# Altium PCB PCB_ESP32-H2-AC-Power-monitoring_2025-10-18.pcbdoc
Units mil, origin at the board's own origin, x right, y up, seen from the top; angles counter-clockwise.
Board outline 5178.72 x 4101.7 mil, 2 copper layers (Top Layer, Bottom Layer); 16 components, 9 nets, 58 pads, 0 vias.
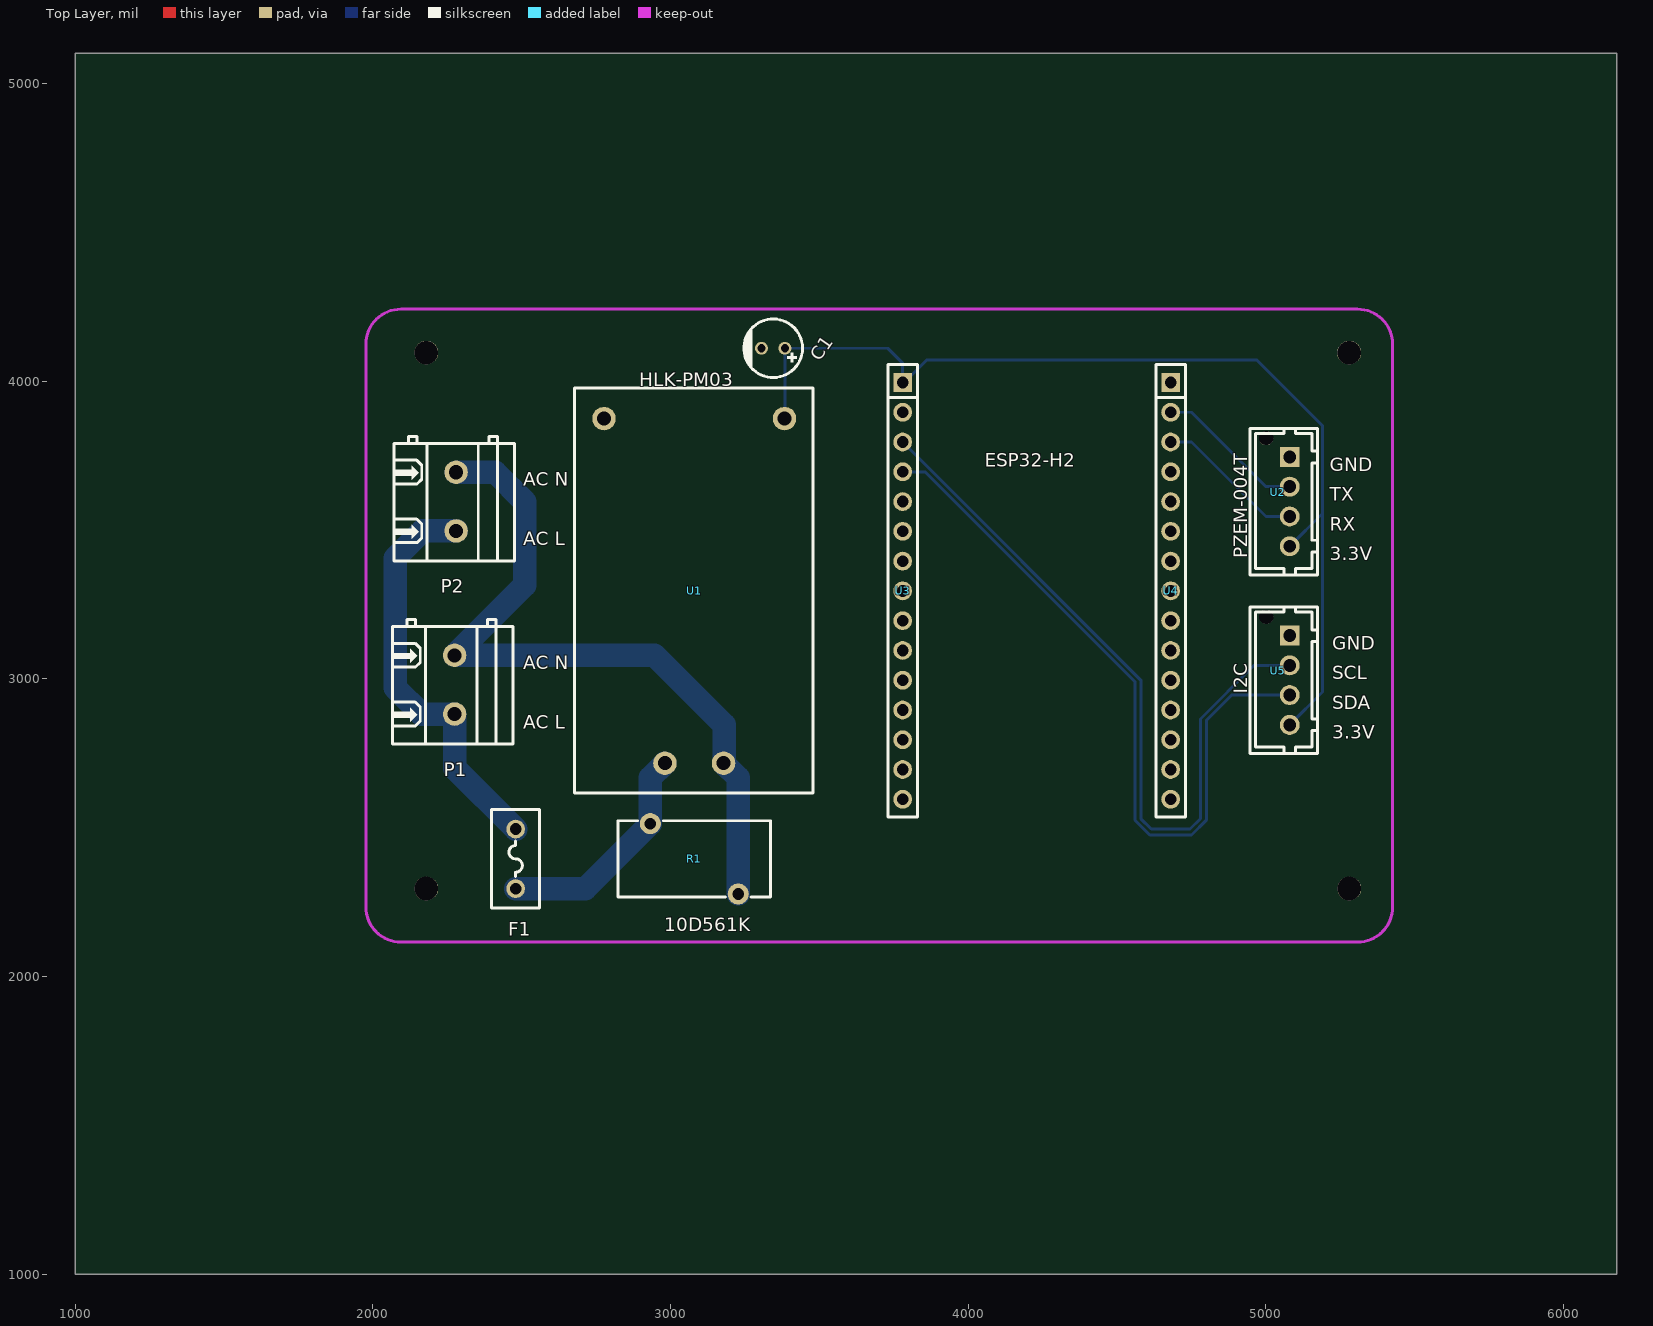
[diagram p0: Top Layer view]
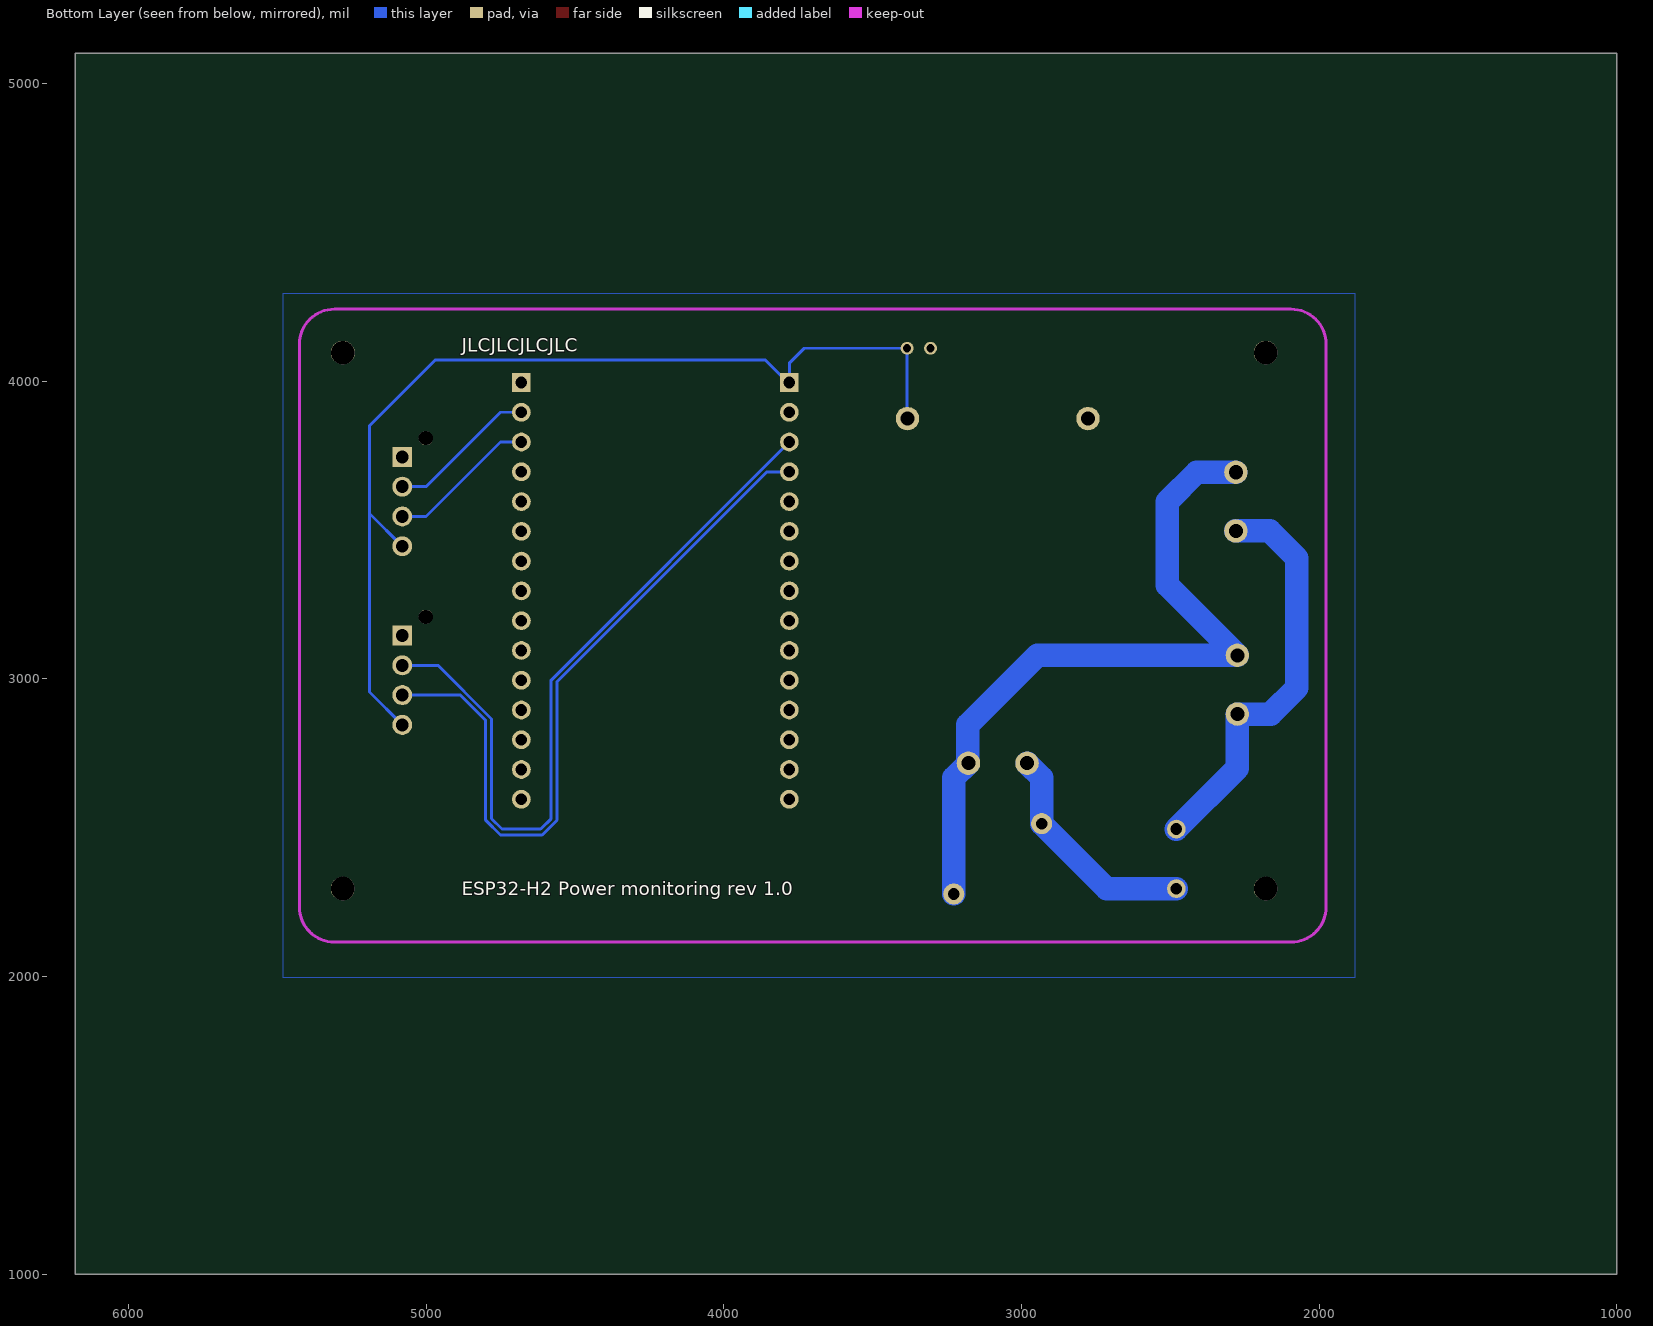
[diagram p1: Bottom Layer view, seen from below]

## Layer stack, top to bottom
Top Layer: signal copper (thickness not stored)
Dielectric: dielectric 12.6, FR-4, Dk 4.8
Bottom Layer: signal copper (thickness not stored)

## Board outline
6178.72,1000 1000,1000 1000,5101.7 6178.72,5101.7

## Components (designator, comment, footprint, x,y, rotation, side; value= is the part's Value field where it differs from the comment)
C1 "100nF" CAP-TH_BD5.0-P2.00-D0.5-FD 3344.72,4110.3 r180 top
F1 "FUSE SPT478T400MA250V" FUSE-TH_L8.4-W4.1-P5.08-D0.6 2479.72,2395.3 r90 top
P1 "WJ128V-5.0-2P" CONN-TH_2P-P5.00_WJ128V-5.0-2P 2274.72,2980.3 r270 top
P2 "WJ128V-5.0-2P" CONN-TH_2P-P5.00_WJ128V-5.0-2P 2279.72,3595.3 r270 top
R1 "10D561K" RES-TH_L13.0-W6.0-P7.50-D0.9-S6.00 3079.72,2395.3 r0 top
U1 "HLK-PM03" PWRM-TH_HLK-PM03 3079.72,3295.3 r90 top
U2 "B4B-XH-AM(LF)(SN)" CONN-TH_B4B-XH-AM-LF-SN 5079.71,3595.3 r90 top
U3 "BX-PM2.54-1-15PY" HDR-TH_15P-P2.54-V-F-1 3779.71,3295.3 r270 top
U4 "BX-PM2.54-1-15PY" HDR-TH_15P-P2.54-V-F-1 4679.71,3295.3 r270 top
U5 "B4B-XH-AM(LF)(SN)" CONN-TH_B4B-XH-AM-LF-SN 5079.71,2995.3 r90 top
? "" ? 1877.01,3195.3 r0 top
? "" ? 3729.71,1898.65 r0 top
? "" ? 1840.86,4172.78 r0 top
? "" ? 1877.87,2202.82 r0 top
? "" ? 2074.72,4347.5 r0 top
? "" ? 5357.16,4321.06 r0 top

## Footprints (in the part's own frame and the unit in brackets; to place one, negate y for a bottom-side part, rotate by r counter-clockwise, add the part's x,y. Pads: shape width x height; smd on the part's side, far side on the other; paste and mask are expansions set on the pad)
CAP-TH_BD5.0-P2.00-D0.5-FD [mm]
  round 1.1 hole 0.7 paste+0 mask+0.05: 1(-1,0) 2(1,0)
  silkscreen extent -2.5,-2.5 2.5,2.5
CONN-TH_2P-P5.00_WJ128V-5.0-2P [mm]
  round 2 hole 1.2 paste+0 mask+0.051: 1(-2.504,0) 2(2.504,0)
  silkscreen extent -5.55,-5.4 5.05,5
CONN-TH_B4B-XH-AM-LF-SN [mm]
  rect 1.7x1.7 hole 1.1 paste+0 mask+0.051: 1(3.81,0)
  round 1.7 hole 1.1 paste+0 mask+0.051: 2(1.27,0) 3(-1.27,0) 4(-3.81,0)
  round 1.2 hole 1.2 unplated paste+0: ""(5.41,2)
  silkscreen extent -6.25,-2.35 6.25,3.4
FUSE-TH_L8.4-W4.1-P5.08-D0.6 [mm]
  round 1.6 hole 1 paste+0 mask+0.05: 1(-2.54,0) 2(2.54,0)
  silkscreen extent -4.2,-2.05 4.2,2.05
HDR-TH_15P-P2.54-V-F-1 [mm]
  rect 1.6x1.575 hole 1 paste+0 mask+0.051: 1(-17.78,0)
  round 1.6 hole 1 paste+0 mask+0.051: 2(-15.24,0) 3(-12.7,0) 4(-10.16,0) 5(-7.62,0) 6(-5.08,0) 7(-2.54,0) 8(0,0) 9(2.54,0) 10(5.08,0) 11(7.62,0) 12(10.16,0) 13(12.7,0) 14(15.24,0) 15(17.78,0)
  silkscreen extent -19.3,-1.25 19.3,1.25
PWRM-TH_HLK-PM03 [mm]
  round 2 hole 1.2 paste+0 mask+0.051: 1(-14.7,2.5) 2(-14.7,-2.5) 3(14.7,7.7) 4(14.7,-7.7)
  silkscreen extent -17.24,-10.12 17.3,10.2
RES-TH_L13.0-W6.0-P7.50-D0.9-S6.00 [mm]
  round 1.8 hole 1 paste+0 mask+0.051: 1(-3.75,3) 2(3.75,-3)
  silkscreen extent -6.5,-3.25 6.5,3.25
? [mil]

## Free pads (board coordinates)
  round 80 hole 80 unplated paste+0: ""(2179.72,2295.3) ""(2179.72,4095.29) ""(5279.71,4095.29) ""(5279.72,2295.3)

## Nets (pads, with @x,y where several pads share a name; then routed paths per layer and width w, separated by ;. In a path a pad name is that pad's centre, name@x,y a point inside that pad or via, vN(x,y) a via of type N, cw(c..) or ccw(c..) an arc to the next point about the centre after c; other vN are vias at no path point)
3.3V: C1.1 U1.4 U2.4 U3.1 U5.4 | length 3456.5
  Bottom Layer w10: U1.4@3383.5,3874.03 3384.72,3875.25 C1.1@3384.72,4110.3 ; C1.1 3729.72,4110.3 3779.72,4060.3 U3.1 3784.71,3995.29 3859.72,4070.3 4969.72,4070.3 5189.72,3850.3 5189.72,3570.3 5189.72,3555.3 ; U5.4 5189.72,2955.3 5189.72,3555.3 ; U2.4 5189.72,3555.3
AC-L: F1.2 P1.2 P2.2 | length 1385.9
  Bottom Layer w78.74: P2.2 2166.12,3496.7 2074.72,3405.3 2074.72,2970.3 2163.32,2881.7 P1.2 2274.72,2700.3 F1.2
AC-N: P1.1 P2.1 R1.2 U1.2 | length 2475.6
  Bottom Layer w78.74: P2.1 2411.12,3693.9 2509.72,3595.3 2509.72,3313.9 P1.1 2946.12,3078.9 3179.72,2845.3 3179.72,2718.1 U1.2@3178.12,2716.5 ; U1.2 3227.35,2667.34 R1.2
GND: C1.2 U1.3 U2.1 U3.13 U3.15 U4.1 U4.10 U4.12 U4.15 U5.1
RX: U2.3 U4.3 | length 503.6
  Bottom Layer w10: U4.3 4749.73,3795.29 4999.72,3545.3 U2.3
SCL: U3.4 U5.3 | length 2468.7
  Bottom Layer w10: U3.4 3854.72,3695.3 4559.72,2990.3 4559.72,2525.3 4609.72,2475.3 4749.72,2475.3 4799.72,2525.3 4799.72,2860.3 4884.72,2945.3 U5.3
SDA: U3.3 U5.2 | length 2534.9
  Bottom Layer w10: U3.3 4579.72,2995.3 4579.72,2530.3 4614.72,2495.3 4744.72,2495.3 4779.72,2530.3 4779.72,2865.3 4959.72,3045.3 U5.2
TX: U2.2 U4.2 | length 503.6
  Bottom Layer w10: U4.2 4749.73,3895.29 4999.72,3645.3 U2.2
U1_1: F1.1 R1.1 U1.1 | length 766.2
  Bottom Layer w78.74: F1.1 2713.97,2295.3 R1.1 2932.07,2667.34 U1.1
pads on no net: U2. U3.2 U3.5 U3.6 U3.7 U3.8 U3.9 U3.10 U3.11 U3.12 U3.14 U4.4 U4.5 U4.6 U4.7 U4.8 U4.9 U4.11 U4.13 U4.14 U5.

## Polygon pours and split planes (outlines as drawn)
GND on Bottom Layer (solid): 5480.34,1995.31 5480.34,4295.3 1880.35,4295.3 1880.35,1995.31

## Keep-outs
Keep-Out Layer:
  lines w10: 1976.57,2233.89 ccw(c2094.68,2233.89) 2094.68,2115.78 ; 1976.57,4123.65 cw(c2094.68,4123.65) 2094.68,4241.76 ; 5307.27,2115.78 ccw(c5307.27,2233.89) 5425.38,2233.89 ; 5307.27,4241.76 cw(c5307.27,4123.65) 5425.38,4123.65

## Silkscreen, mask and mechanical layers (free items; w line width, h text height)
Top Overlay:
  text "ESP32-H2" at 4054.72,3712.8 h45
  text "GND" at 5214.72,3697.8 h45
  text "AC N" at 2504.72,3647.8 h45
  text "TX" at 5214.72,3597.8 h45
  text "RX" at 5214.72,3497.8 h45
  text "AC L" at 2504.72,3447.8 h45
  text "PZEM-004T" at 4937.22,3405.3 h45 r90
  text "3.3V" at 5214.72,3397.8 h45
  text "GND" at 5222.2,3097.99 h45
  text "AC N" at 2504.72,3032.8 h45
  text "SCL" at 5222.2,2997.99 h45
  text "I2C" at 4937.22,2950.3 h45 r90
  text "SDA" at 5222.2,2897.99 h45
  text "AC L" at 2504.72,2832.8 h45
  text "3.3V" at 5222.2,2797.99 h45
Bottom Overlay:
  text "JLCJLCJLCJLC" at 4879.72,4097.8 h45
  text "ESP32-H2 Power monitoring rev 1.0" at 4879.71,2272.8 h45